# EAGLE board ConexionArduinos (EAGLE 9.7.0)

Size 341.12 x 231.25 mm. Coordinates in mm from the lower left corner, seen from the top.
Outline: 0,0 341.12,0 341.12,231.25 0,231.25 0,0
Copper layers (1*16): Top 0.035mm / dielectric 1.5mm / Bottom 0.035mm
Design rules "default": minimum track width 6mil, minimum drill 0.35mm, track to track 6mil, track to pad 6mil, pad to pad 6mil, via to via 6mil, smd to smd 6mil, copper to edge 40mil, drill to drill 6mil, minimum pad ring 10mil, minimum via ring 8mil, stop-mask expansion 4mil, vias tented up to drill 0mil, thermal gap 10mil

## Footprints (pad centres in the part's own frame; a part is rotated, then mirrored left to right if it is on the bottom)
LEDRD254W60D565H860B = drill 0.981 pad 1.581: 1 -1.27,0; 2 1.27,0
BATTERY-GENERIC = drill 1.118 pad 3.15 octagon: + 2.54,0; - -2.54,0
RESAD1016W63L850D250B = drill 0.83 pad 1.43: 1 -5.08,0; 2 5.08,0
HA-06-SM065 = drill 1 pad 1.676: 1 -2.54,-2.54; 2 0,2.54; 3 2.54,-2.54
78B04ST = drill 0.8: 1 -3.81,-3.81; 2 -1.27,-3.81; 3 1.27,-3.81; 4 3.81,-3.81; 5 3.81,3.81; 6 1.27,3.81; 7 -1.27,3.81; 8 -3.81,3.81
DIP762W53P254L1969H508Q16B = drill 0.743 pad 1.343: 1 -3.81,8.89; 2 -3.81,6.35; 3 -3.81,3.81; 4 -3.81,1.27; 5 -3.81,-1.27; 6 -3.81,-3.81; 7 -3.81,-6.35; 8 -3.81,-8.89; 9 3.81,-8.89; 10 3.81,-6.35; 11 3.81,-3.81; 12 3.81,-1.27; 13 3.81,1.27; 14 3.81,3.81; 15 3.81,6.35; 16 3.81,8.89
DIP762W53P254L1969H508Q14B = drill 0.743 pad 1.343: 1 -3.81,7.62; 2 -3.81,5.08; 3 -3.81,2.54; 4 -3.81,0; 5 -3.81,-2.54; 6 -3.81,-5.08; 7 -3.81,-7.62; 8 3.81,-7.62; 9 3.81,-5.08; 10 3.81,-2.54; 11 3.81,0; 12 3.81,2.54; 13 3.81,5.08; 14 3.81,7.62
ARDUINO-UNO-R3-SHIELD = drill 1.016 pad 1.88: 3.3V 24.13,-2.54; 5V 24.13,0; A0 24.13,12.7; A1 24.13,15.24; A2 24.13,17.78; A3 24.13,20.32; A4 24.13,22.86; A5 24.13,25.4; AREF -24.13,-13.97; D2 -24.13,20.32; D3 -24.13,17.78; D4 -24.13,15.24; D5 -24.13,12.7; D6 -24.13,10.16; D7 -24.13,7.62; D8 -24.13,3.81; D9 -24.13,1.27; D10 -24.13,-1.27; D11 -24.13,-3.81; D12 -24.13,-6.35; D13 -24.13,-8.89; GND@0 24.13,2.54; GND@1 24.13,5.08; GND@2 -24.13,-11.43; IOREF 24.13,-7.62; NC 24.13,-10.16; RES 24.13,-5.08; RX -24.13,25.4; SCL -24.13,-19.05; SDA -24.13,-16.51; TX -24.13,22.86; VIN 24.13,7.62
JHD-162A = drill 1.016 long: 1 -19.05,0; 2 -16.51,0; 3 -13.97,0; 4 -11.43,0; 5 -8.89,0; 6 -6.35,0; 7 -3.81,0; 8 -1.27,0; 9 1.27,0; 10 3.81,0; 11 6.35,0; 12 8.89,0; 13 11.43,0; 14 13.97,0; 15 16.51,0; 16 19.05,0

## Placement (x,y rotation side)
D1  RED  [LEDRD254W60D565H860B]  6.06,195.42 180 top
D2  RED  [LEDRD254W60D565H860B]  11.14,195.42 180 top
D3  RED  [LEDRD254W60D565H860B]  16.22,195.42 180 top
D4  RED  [LEDRD254W60D565H860B]  21.3,195.42 180 top
D5  RED  [LEDRD254W60D565H860B]  26.38,195.42 180 top
D6  RED  [LEDRD254W60D565H860B]  31.46,195.42 180 top
D7  RED  [LEDRD254W60D565H860B]  36.54,195.42 180 top
D8  RED  [LEDRD254W60D565H860B]  41.62,195.42 180 top
D10  RED  [LEDRD254W60D565H860B]  67.25,122.39 180 top
D17  RED  [LEDRD254W60D565H860B]  237.81,176.8 180 top
P1  BATTERYGENERIC  [BATTERY-GENERIC]  92.76,223 180 top
R1  1k  [RESAD1016W63L850D250B]  7.33,187.8 90 top
R2  1k  [RESAD1016W63L850D250B]  12.41,187.8 90 top
R3  1k  [RESAD1016W63L850D250B]  17.49,187.8 90 top
R4  1k  [RESAD1016W63L850D250B]  22.57,187.8 90 top
R5  1k  [RESAD1016W63L850D250B]  27.65,187.8 90 top
R6  1k  [RESAD1016W63L850D250B]  32.73,187.8 90 top
R7  1k  [RESAD1016W63L850D250B]  37.81,187.8 90 top
R8  1k  [RESAD1016W63L850D250B]  42.89,187.8 90 top
R10  1k  [RESAD1016W63L850D250B]  72.56,117.1 90 top
R11  220  [RESAD1016W63L850D250B]  304.21,84.26 270 top
R17  100  [RESAD1016W63L850D250B]  234,179.34 180 top
RPOT1  250k  [HA-06-SM065]  263.57,58.86 0 top
SW3  SPST-478B04ST  [78B04ST]  109.34,142.9 0 top
SW4  SPST-478B04ST  [78B04ST]  122.04,142.9 0 top
U1  74HC595_PDIP  [DIP762W53P254L1969H508Q16B]  21.35,140.45 270 top
U2  74HC86_PDIP  [DIP762W53P254L1969H508Q14B]  98.19,188.95 90 top
U4  ARDUINO-UNO-R3-SHIELD  [ARDUINO-UNO-R3-SHIELD]  62.12,62.94 270 top
U5  74HC32_PDIP  [DIP762W53P254L1969H508Q14B]  190.82,188.23 90 top
U6  74HC32_PDIP  [DIP762W53P254L1969H508Q14B]  223.84,188.23 90 top
U7  74HC86_PDIP  [DIP762W53P254L1969H508Q14B]  131.21,188.95 90 top
U9  ARDUINO-UNO-R3-SHIELD  [ARDUINO-UNO-R3-SHIELD]  190.21,62.54 270 top
U10  LCD-16X2JHD-162A  [JHD-162A]  285.49,36.63 0 top

## Library data of the parts
D1-D8 D10 D17 = Tinkercad; CATEGORY: Opto-Electronic; SUB-CATEGORY: LED; VALUE: LED_RED
P1 R1-R8 R10 R11 R17 RPOT1 SW3 SW4 U1 U2 U4-U7 U9 U10 = Tinkercad

## Nets
D1_A: D1.1 R1.2
D2_A: D2.1 R2.2
D3_A: D3.1 R3.2
D4_A: D4.1 R4.2
D5_A: D5.1 R5.2
D6_A: D6.1 R6.2
D7_A: D7.1 R7.2
D8_A: D8.1 R8.2
D10_A: D10.1 R10.2
D17_A: D17.1 R17.1
P1+: P1.+ SW3.1 SW3.2 SW3.3 SW3.4 SW4.1 SW4.2 SW4.3 SW4.4 U1.10 U1.16 U2.14 U5.14 U6.14 U7.14
P1-: D1.2 D2.2 D3.2 D4.2 D5.2 D6.2 D7.2 D8.2 D10.2 D17.2 P1.- RPOT1.3 U1.8 U1.13 U2.7 U4.GND@0 U4.GND@1 U4.GND@2 U5.7 U6.7 U7.7 U9.GND@0 U9.GND@1 U9.GND@2 U10.1 U10.5 U10.16
U1_Q0: R8.1 U1.15 U7.13
U1_Q1: R7.1 U1.1 U7.10
U1_Q2: R6.1 U1.2 U7.5
U1_Q4: R4.1 U1.4 U2.13
U1_Q5: R3.1 U1.5 U2.10
U1_Q6: R2.1 U1.6 U2.5
U1_Q7: R1.1 U1.7 U2.2
U2_1A: SW3.8 U2.1
U2_1Y: U2.3 U5.1
U2_2A: SW3.7 U2.4
U2_2Y: U2.6 U5.2
U2_3A: SW3.6 U2.9
U2_3Y: U2.8 U5.5
U2_4A: SW3.5 U2.12
U2_4Y: U2.11 U5.9
U4_D3: U1.14 U4.D3 U9.D7
U4_D6: R10.1 U4.D6 U9.D6
U4_D9: U1.11 U4.D9
U4_D10: U1.12 U4.D10
U5_1Y: U5.3 U5.4
U5_2Y: U5.6 U5.10
U5_4A: U5.8 U5.12
U5_4B: U5.13 U7.3
U5_4Y: U5.11 U6.12
U6_2B: U6.5 U6.8
U6_4Y: U6.10 U6.11
U7_1A: SW4.8 U7.1
U7_1B: R5.1 U1.3 U7.2
U7_2A: SW4.7 U7.4
U7_2Y: U6.13 U7.6
U7_3A: SW4.6 U7.9
U7_3Y: U6.9 U7.8
U7_4A: SW4.5 U7.12
U7_4Y: U6.4 U7.11
U9_5V: R11.1 RPOT1.1 U9.5V U10.2
U9_D2: U9.D2 U10.14
U9_D3: U9.D3 U10.13
U9_D4: U9.D4 U10.12
U9_D5: U9.D5 U10.11
U9_D8: R17.2 U6.6 U9.D8
U9_D11: U9.D11 U10.6
U9_D12: U9.D12 U10.4
U9_D13: U4.D13 U9.D13
U10_LED+: R11.2 U10.15
U10_VO: RPOT1.2 U10.3

## Tracks (layer width: path | path; a pad name or v marks a point on that pad's centre or on a via)
D1_A  (1 unrouted)
D2_A  (1 unrouted)
D3_A  (1 unrouted)
D4_A  (1 unrouted)
D5_A  (1 unrouted)
D6_A  (1 unrouted)
D7_A  (1 unrouted)
D8_A  (1 unrouted)
D10_A  (1 unrouted)
D17_A  (1 unrouted)
P1+  (14 unrouted)
P1-  (26 unrouted)
U1_Q0  (2 unrouted)
U1_Q1  (2 unrouted)
U1_Q2  (2 unrouted)
U1_Q4  (2 unrouted)
U1_Q5  (2 unrouted)
U1_Q6  (2 unrouted)
U1_Q7  (2 unrouted)
U2_1A  (1 unrouted)
U2_1Y  (1 unrouted)
U2_2A  (1 unrouted)
U2_2Y  (1 unrouted)
U2_3A  (1 unrouted)
U2_3Y  (1 unrouted)
U2_4A  (1 unrouted)
U2_4Y  (1 unrouted)
U4_D3  (2 unrouted)
U4_D6  (2 unrouted)
U4_D9  (1 unrouted)
U4_D10  (1 unrouted)
U5_1Y  (1 unrouted)
U5_2Y  (1 unrouted)
U5_4A  (1 unrouted)
U5_4B  (1 unrouted)
U5_4Y  (1 unrouted)
U6_2B  (1 unrouted)
U6_4Y  (1 unrouted)
U7_1A  (1 unrouted)
U7_1B  (2 unrouted)
U7_2A  (1 unrouted)
U7_2Y  (1 unrouted)
U7_3A  (1 unrouted)
U7_3Y  (1 unrouted)
U7_4A  (1 unrouted)
U7_4Y  (1 unrouted)
U9_5V  (3 unrouted)
U9_D2  (1 unrouted)
U9_D3  (1 unrouted)
U9_D4  (1 unrouted)
U9_D5  (1 unrouted)
U9_D8  (2 unrouted)
U9_D11  (1 unrouted)
U9_D12  (1 unrouted)
U9_D13  (1 unrouted)
U10_LED+  (1 unrouted)
U10_VO  (1 unrouted)